# EAGLE board VCSeq PCB1 1.5 TH (EAGLE 6.5.0)
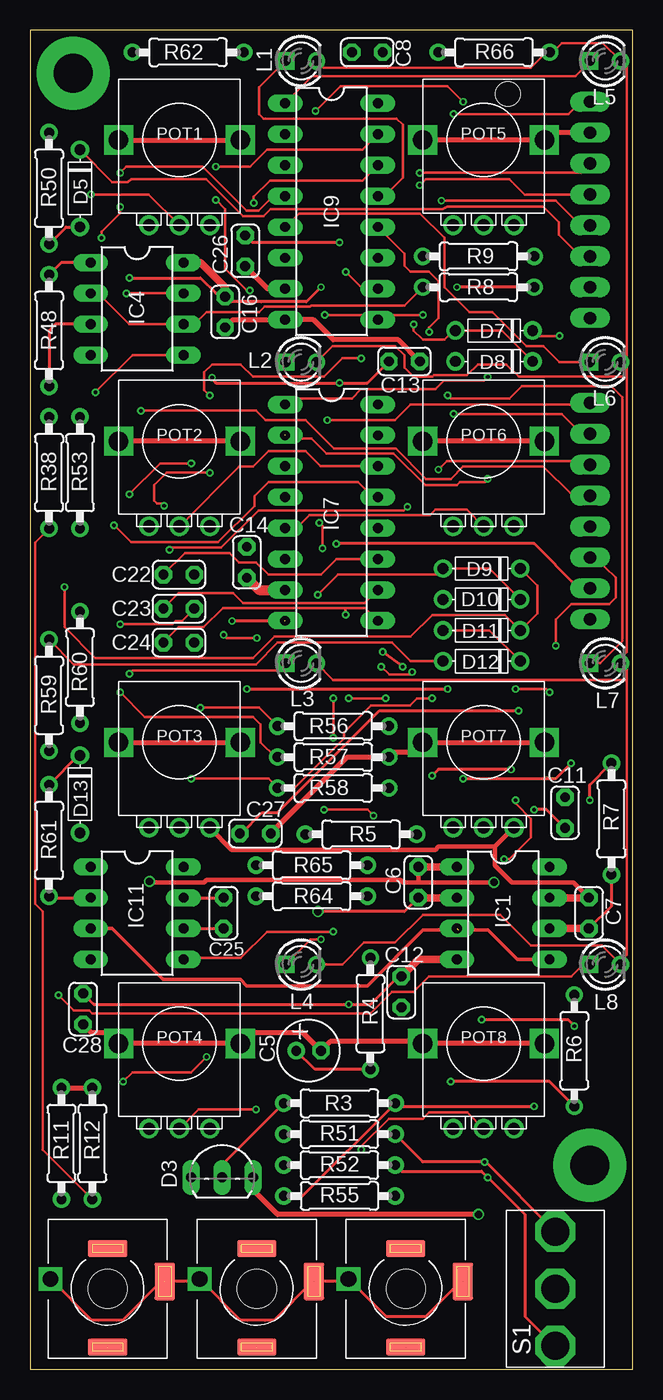
[diagram p0: board, top side]
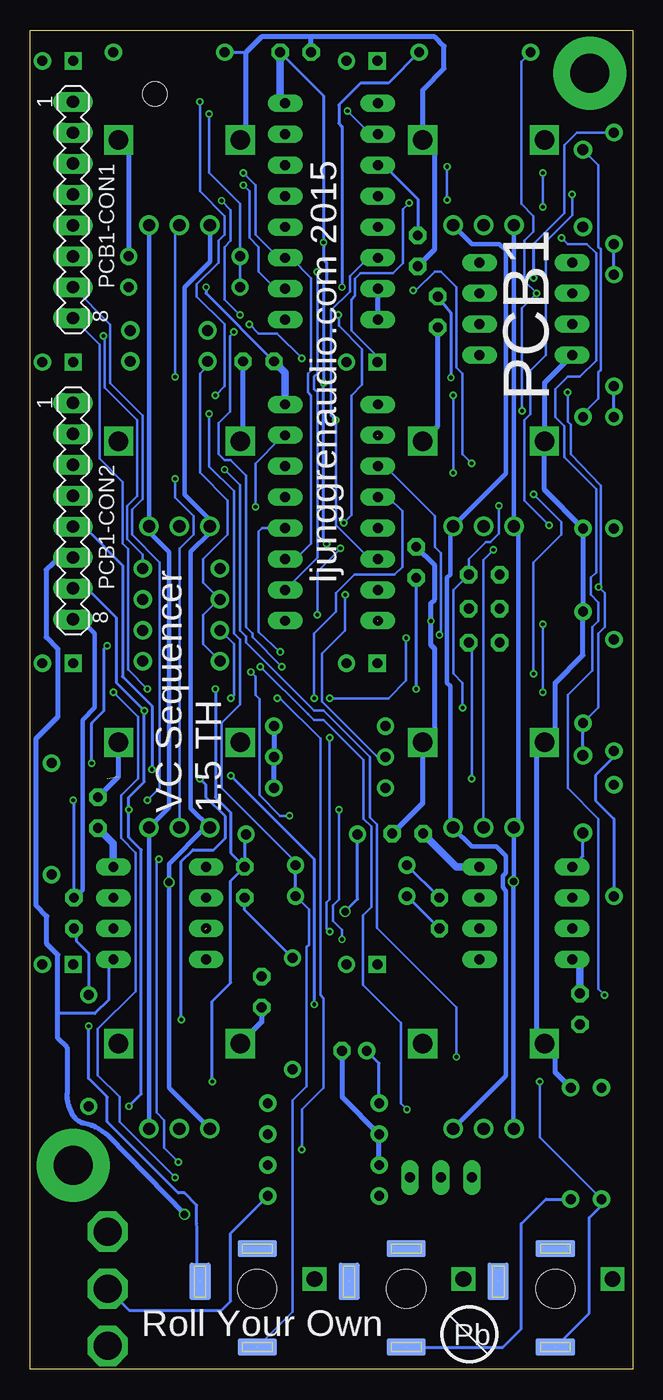
[diagram p1: board, bottom side, seen from below]

Size 49.5 x 110 mm. Coordinates in mm from the lower left corner, seen from the top.
Outline: 0,0 49.5,0 49.5,10 49.5,110 0,110 0,0
Copper layers (1*16): Top 0.035mm / dielectric 1.5mm / Bottom 0.035mm
Design rules "hackvana 12 mil pads 24 mil thermal": minimum track width 6mil, minimum drill 0.3mm, track to track 6mil, track to pad 6mil, pad to pad 6mil, via to via 6mil, smd to smd 0mil, copper to edge 6mil, drill to drill 6mil, minimum pad ring 12mil, minimum via ring 6mil, stop-mask expansion 2mil, vias tented up to drill 100mil, thermal gap 24mil
Holes 3.2 mm at 6.36,6.6 18.61,6.6 30.87,6.6
Holes 2 mm at 39.25,104.78

## Footprints (pad centres in the part's own frame; a part is rotated, then mirrored left to right if it is on the bottom)
E2-5 = drill 0.813 pad 1.27: + -1.016,0 | drill 0.813 pad 1.27 octagon: - 1.016,0
C025-024X044 = drill 0.813 octagon: 1 -1.27,0; 2 1.27,0
ERTHENVAR-SLOTS = smd 3.2 x 1.4 bottom: NORMLB 0,-3.3; TIPB 0,4.8 | smd 3.2 x 1.4: NORMLT 0,-3.3; TIPT 0,4.8 | smd 1.7 x 3.1 bottom: RING1B -4.7,-0.6 | smd 1.7 x 3.1: RING1T -4.7,-0.6 | drill 1.3 pad 1.778 square: RING2H 4.7,-0.8
TO92-LINE = drill 0.813 long: 1 2.54,0; 2 0,0; 3 -2.54,0
DO35-6 = drill 0.9: ANODE 3.175,0; CATHODE -3.175,0
DIL08 = drill 0.813 pad 1.27 long: 1 -3.81,-3.81; 2 -1.27,-3.81; 3 1.27,-3.81; 4 3.81,-3.81; 5 3.81,3.81; 6 1.27,3.81; 7 -1.27,3.81; 8 -3.81,3.81
DIL16 = drill 0.813 long: 1 -8.89,-3.81; 2 -6.35,-3.81; 3 -3.81,-3.81; 4 -1.27,-3.81; 5 1.27,-3.81; 6 3.81,-3.81; 7 6.35,-3.81; 8 8.89,-3.81; 9 8.89,3.81; 10 6.35,3.81; 11 3.81,3.81; 12 1.27,3.81; 13 -1.27,3.81; 14 -3.81,3.81; 15 -6.35,3.81; 16 -8.89,3.81
LED3MM = drill 0.813 square: A -1.27,0 | drill 0.813: K 1.27,0
MA08-1 = drill 1.016 long: 1 -8.89,0; 2 -6.35,0; 3 -3.81,0; 4 -1.27,0; 5 1.27,0; 6 3.81,0; 7 6.35,0; 8 8.89,0
POT-ALPHA9 = drill 1.6 pad 2.184 square: GND$1 -5,0; GND$2 5,0 | drill 1: LEFT -2.5,-7; MID 0,-7; RIGHT 2.5,-7
0207/9 = drill 0.813: 1 -4.58,0; 2 4.58,0
SPDT-HORIZONTAL-TOP-SUBMINI-MULTICOMP = drill 2.3 pad 3.1 octagon: 1 4.7,0; 2 0,0; 3 -4.7,0

## Placement (x,y rotation side)
C5  10uF  [E2-5]  22.87,26.16 0 top
C6  100nF  [C025-024X044]  31.89,40.01 270 top
C7  100nF  [C025-024X044]  45.92,37.47 270 top
C8  100nF  [C025-024X044]  27.69,108.2 0 top
C11  100nF  [C025-024X044]  43.95,45.72 270 top
C12  100nF  [C025-024X044]  30.49,30.99 270 top
C13  100nF  [C025-024X044]  30.74,82.8 180 top
C14  100nF  [C025-024X044]  17.79,66.29 90 top
C16  100nF  [C025-024X044]  16.01,86.87 90 top
C22  1nF  [C025-024X044]  12.2,65.28 180 top
C23  1nF  [C025-024X044]  12.2,62.48 180 top
C24  1nF  [C025-024X044]  12.2,59.69 180 top
C25  15pF  [C025-024X044]  15.88,37.47 270 top
C26  100nF  [C025-024X044]  17.66,91.88 90 top
C27  100nF  [C025-024X044]  18.49,44.01 180 top
C28  100nF  [C025-024X044]  4.33,29.59 270 top
CV/CLK-IN  ERTHENVAR_3.5MM_JACKSLOTS  [ERTHENVAR-SLOTS]  6.35,6.6 180 top
D3  LM4040 5V  [TO92-LINE]  15.76,15.75 0 top
D5  1N4148  [DO35-6]  4.07,97.03 270 top
D7  1N4148  [DO35-6]  38.11,85.34 180 top
D8  1N4148  [DO35-6]  38.11,82.8 180 top
D9  1N4148  [DO35-6]  37.09,65.79 180 top
D10  1N4148  [DO35-6]  37.09,63.25 180 top
D11  1N4148  [DO35-6]  37.09,60.71 180 top
D12  1N4148  [DO35-6]  37.09,58.17 180 top
D13  1N4148  [DO35-6]  4.07,47.24 270 top
IC1  LM358  [DIL08]  38.87,37.47 270 top
IC4  LM393  [DIL08]  8.77,87.12 270 top
IC7  CD4051  [DIL16]  24.75,70.38 270 top
IC9  CD4051  [DIL16]  24.75,95.12 270 top
IC11  TL072  [DIL08]  8.77,37.47 270 top
L1  Amber  [LED3MM]  22.25,107.5 0 top
L2  Amber  [LED3MM]  22.25,82.75 0 top
L3  Amber  [LED3MM]  22.25,58 0 top
L4  Amber  [LED3MM]  22.25,33.25 0 top
L5  Amber  [LED3MM]  47.25,107.5 0 top
L6  Amber  [LED3MM]  47.25,82.75 0 top
L7  Amber  [LED3MM]  47.25,58 0 top
L8  Amber  [LED3MM]  47.25,33.25 0 top
OUT  ERTHENVAR_3.5MM_JACKSLOTS  [ERTHENVAR-SLOTS]  30.85,6.6 180 top
PCB1-CON1  [MA08-1]  46,95.25 270 bottom
PCB1-CON2  [MA08-1]  46,70.5 270 bottom
POT1  100K  [POT-ALPHA9]  12.25,101 0 top
POT2  100K  [POT-ALPHA9]  12.25,76.25 0 top
POT3  100K  [POT-ALPHA9]  12.25,51.5 0 top
POT4  100K  [POT-ALPHA9]  12.25,26.75 0 top
POT5  100K  [POT-ALPHA9]  37.25,101 0 top
POT6  100K  [POT-ALPHA9]  37.25,76.25 0 top
POT7  100K  [POT-ALPHA9]  37.25,51.5 0 top
POT8  100K  [POT-ALPHA9]  37.25,26.75 0 top
R3  4.7K  [0207/9]  25.41,21.84 0 top
R4  27K  [0207/9]  27.95,29.21 270 top
R5  27K  [0207/9]  27.19,43.94 0 top
R6  27K  [0207/9]  44.71,26.16 270 top
R7  27K  [0207/9]  47.76,45.21 90 top
R8  100K  [0207/9]  36.84,88.9 0 top
R9  27K  [0207/9]  36.84,91.44 0 top
R11  100K  [0207/9]  2.55,18.54 270 top
R12  100K  [0207/9]  5.09,18.54 270 top
R38  27K  [0207/9]  1.53,73.66 90 top
R48  1M  [0207/9]  1.53,85.34 90 top
R50  27K  [0207/9]  1.53,97.03 90 top
R51  1M  [0207/9]  25.41,19.3 0 top
R52  1M  [0207/9]  25.41,16.76 0 top
R53  1M  [0207/9]  4.07,73.66 90 top
R55  100K  [0207/9]  25.41,14.22 180 top
R56  100K  [0207/9]  24.9,52.83 0 top
R57  100K  [0207/9]  24.9,50.29 0 top
R58  100K  [0207/9]  24.9,47.75 0 top
R59  100K  [0207/9]  1.53,55.37 270 top
R60  100K  [0207/9]  4.07,57.66 90 top
R61  100K  [0207/9]  1.53,43.43 90 top
R62  27K  [0207/9]  12.96,108.2 0 top
R64  100K  [0207/9]  23.12,38.86 0 top
R65  1K  [0207/9]  23.12,41.4 0 top
R66  2.2K  [0207/9]  38.11,108.2 0 top
R-IN  ERTHENVAR_3.5MM_JACKSLOTS  [ERTHENVAR-SLOTS]  18.6,6.6 180 top
S1  SPDT on-off-on  [SPDT-HORIZONTAL-TOP-SUBMINI-MULTICOMP]  43.15,6.6 270 top

## Library data of the parts
C5-C8 C11-C14 C16 C22-C28 CV/CLK-IN D3 D5 D7-D13 IC1 IC4 IC7 IC9 IC11 L1-L8 OUT POT1-POT8 R3-R9 R11 R12 R38 R48 R50-R53 R55-R62 R64-R66 R-IN S1 = Roll Your Own
PCB1-CON1 PCB1-CON2 = Roll Your Own; OC_FARNELL: unknown; OC_NEWARK: unknown

## Nets
0V: C5.- C8.1 C11.1 C12.2 C13.1 C14.2 C16.1 C26.1 C27.1 C28.2 CV/CLK-IN.RING1B CV/CLK-IN.RING1T CV/CLK-IN.RING2H D3.1 IC1.3 IC1.5 IC4.4 IC7.8 IC9.7 IC9.8 IC11.3 OUT.RING1B OUT.RING1T OUT.RING2H PCB1-CON1.2 PCB1-CON2.6 POT1.GND$1 POT1.GND$2 POT2.GND$1 POT2.GND$2 POT3.GND$1 POT3.GND$2 POT4.GND$1 POT4.GND$2 POT5.GND$1 POT5.GND$2 POT6.GND$1 POT6.GND$2 POT7.GND$1 POT7.GND$2 POT8.GND$1 POT8.GND$2 R9.2 R11.1 R12.1 R51.1 R52.1 R53.1 R56.2 R57.2 R58.2 R60.2 R66.1 R-IN.RING1B R-IN.RING1T R-IN.RING2H
+5V: C7.1 IC1.7 PCB1-CON2.8 POT1.RIGHT POT2.RIGHT POT3.RIGHT POT4.RIGHT POT5.RIGHT POT6.RIGHT POT7.RIGHT POT8.RIGHT R7.2
+12V: C8.2 C11.2 C13.2 C16.2 C26.2 C27.2 IC1.8 IC4.8 IC7.16 IC9.3 IC9.16 IC11.8 PCB1-CON2.7 R3.2 R8.2 R50.2 R55.2 R62.2
-5V: C6.1 C14.1 IC1.1 IC7.7 POT1.LEFT POT2.LEFT POT3.LEFT POT4.LEFT POT5.LEFT POT6.LEFT POT7.LEFT POT8.LEFT R5.2 R6.2
-12V: C12.1 C28.1 IC1.4 IC11.4 PCB1-CON2.5
BUS_A1: C22.2 IC7.11 IC9.11 PCB1-CON1.3
BUS_B1: C23.2 IC7.10 IC9.10 PCB1-CON1.4
BUS_C1: C24.2 IC7.9 IC9.9 PCB1-CON1.5
COMP_REF_1: IC4.2 IC4.6 PCB1-CON1.1 R8.1 R9.1
CV/CLOCK-IN1: CV/CLK-IN.TIPB CV/CLK-IN.TIPT PCB1-CON2.3 R11.2
DISABLE1: IC7.6 IC9.6 PCB1-CON2.1
N$3: C25.2 IC11.6 R64.1
N$4: R12.2 R38.1 R-IN.TIPB R-IN.TIPT
N$6: C7.2 IC1.6 R6.1 R7.1
N$11: D8.ANODE D10.ANODE D12.ANODE R59.1
N$12: IC4.3 R38.2 R48.1
N$14: D5.ANODE IC4.1 R48.2 R50.1
N$15: L1.K L2.K L3.K L4.K L5.K L6.K L7.K L8.K R66.2
N$18: IC7.4 POT8.MID
N$19: IC7.2 POT7.MID
N$20: IC7.5 POT6.MID
N$21: IC7.1 POT5.MID
N$22: IC7.12 POT4.MID
N$23: IC7.15 POT3.MID
N$24: IC7.14 POT2.MID
N$25: IC7.13 POT1.MID
N$30: R55.1 S1.2
N$31: C6.2 IC1.2 R4.1 R5.1
N$39: C5.+ D3.2 R3.1 R4.2
N$42: IC7.3 IC11.5
N$43: C22.1 D7.ANODE D8.CATHODE R56.1
N$48: C23.1 D9.ANODE D10.CATHODE R57.1
N$52: C24.1 D11.ANODE D12.CATHODE R58.1
N$55: D13.ANODE IC11.1
N$60: IC11.2 R59.2 R61.1
N$61: D7.CATHODE D9.CATHODE D11.CATHODE D13.CATHODE IC4.5 R60.1 R61.2
N$93: C25.1 IC11.7 R65.1
OUT1: OUT.TIPB OUT.TIPT PCB1-CON2.2 R64.2 R65.2
PE1: PCB1-CON1.8 R52.2 S1.1
RESET1: D5.CATHODE PCB1-CON1.6 R53.2
STEP1: IC9.13 L1.A
STEP2: IC9.14 L2.A
STEP3: IC9.15 L3.A
STEP4: IC9.12 L4.A
STEP5: IC9.1 L5.A
STEP6: IC9.5 L6.A
STEP7: IC9.2 L7.A
STEP8: IC9.4 L8.A
TRIGS1: IC4.7 PCB1-CON2.4 R62.1
U/D1: PCB1-CON1.7 R51.2 S1.3

## Tracks (layer width: path | path; a pad name or v marks a point on that pad's centre or on a via)
0V  (via drill 0.3, 0.6)  (6 unrouted)
  Top 0.22: v43.19,59.44 43.19,61.59 44.46,62.87 47.57,62.87 48.11,63.41 48.11,65.05 46.41,66.69
  Top 0.254: CV/CLK-IN.RING2H 4.99,4.06 7.63,4.06 10.76,7.2 CV/CLK-IN.RING1T 13.7,7.2 R-IN.RING2H 17.24,4.06 20.07,4.06 23.21,7.2 R-IN.RING1T 25.95,7.2 OUT.RING2H 29.23,4.32 32.52,4.32 35.4,7.2 OUT.RING1T | 20.92,61.47 v16.58,61.47 | v44.71,28.19 44.2,28.7 v37.09,28.7 | v35.57,48.51 43.19,48.51 v44.46,49.78 | 46.41,66.69 PCB1-CON2.6
  Top 0.3: IC1.5 40.01,33.66 37.6,36.07 35.19,36.07 | 34.93,36.07 32.27,36.07 27.69,31.5 17.79,31.5 17.28,32 10.93,32 6.74,36.2 IC11.3
  Top 0.406: v36.84,12.7 20.33,12.7 18.23,14.8 18.23,16.19 D3.1 | IC1.3 34.93,36.07 | PCB1-CON1.2 42.93,101.6 42.33,101 POT5.GND$2 POT5.GND$1 | POT1.GND$1 POT1.GND$2 | C26.1 19.51,88.77 IC9.7 | C16.1 16.64,86.23 IC9.8 23.25,86.23 24.9,84.58 30.23,84.58 C13.1 | POT6.GND$2 POT6.GND$1 | POT2.GND$2 POT2.GND$1 | POT3.GND$1 POT3.GND$2 | C28.2 4.96,27.69 6.36,27.69 7.25,26.79 POT4.GND$1 POT4.GND$2 18.19,27.69 22.36,27.69 C5.- 24.65,26.92 32.08,26.92 POT8.GND$1 POT8.GND$2 | R11.1 R12.1 | POT7.GND$2 POT7.GND$1 31.42,50.67 29.85,50.67 R57.2 26.04,50.29 C27.1
  Bottom 0.254: 18.23,16.19 D3.1 | 35.8,7.45 35.8,11.67 35.82,11.94 35.82,13.46 36.84,14.48 37.35,14.48 43.19,20.32 43.19,22.35 44.71,23.88 v44.71,28.19 | 43.06,33.66 43.06,30.35 44.2,29.21 47.25,29.21 | v37.09,28.7 37.09,41.72 36.14,42.67 34.42,42.67 33.47,43.62 33.47,45.4 35.06,46.99 35.06,48.01 v35.57,48.51 | v44.46,49.78 44.46,53.09 43.44,54.1 43.44,59.18 v43.19,59.44 | R66.1 31.76,108.2
  Bottom 0.406: v36.84,12.7 43.12,19.18 arc-31 45.09,20.19 arc45 45.98,20.83 arc27 46.49,22.61 46.49,26.42 47.25,27.18 47.25,29.21 47.25,34.04 48.14,34.92 48.14,37.21 49.03,38.1 49.03,51.82 47.25,53.59 47.25,59.18 48.2,60.13 48.2,65.66 47.11,66.69 PCB1-CON2.6 | 35.8,7.45 OUT.RING1T | 43.06,33.66 IC1.5 | POT5.GND$1 31.76,101.49 31.76,108.2 30.49,109.47 26.42,109.47 | 26.42,109.47 16.26,109.47 15.5,108.71 15.5,106.87 17.25,105.13 POT1.GND$2 16.26,100.01 16.26,92.01 C26.1 | C8.1 26.42,109.47 | IC9.8 IC9.7 | POT5.GND$2 41.42,100.17 R9.2 | IC4.4 7.25,81.02 POT2.GND$1 7.25,72.26 R53.1 R60.2 4.07,58.67 6.36,56.39 6.36,52.39 POT3.GND$1 7.25,51.18 7.88,50.55 7.88,27.38 POT4.GND$1 7.2,26.75 6.36,25.91 6.36,24.39 R12.1 | POT2.GND$2 16.01,77.49 C16.1 | C14.2 16.26,66.04 16.26,63.25 16.58,62.93 v16.58,61.47 16.58,59.5 16.26,59.18 16.26,52.49 POT3.GND$2 17.25,46.51 C27.1 | R52.1 R51.1 23.88,22.35 C5.- | C12.2 30.49,28.51 POT8.GND$1 | R58.2 R57.2 R56.2 | C11.1 42.25,48.69 POT7.GND$2 | C13.1 32.01,76.49 POT6.GND$1
+5V  (via drill 0.3)
  Top 0.254: v45.98,46.74 45.98,48.01 R7.2
  Top 0.35: POT3.RIGHT 14.75,44.46 16.54,42.67 33.28,42.67 33.54,42.93 38.18,42.93 | POT7.RIGHT 38.18,42.93 | 38.18,42.93 38.18,41.4 39.57,40.01 44.65,40.01 C7.1
  Top 0.6: IC1.7 C7.1
  Bottom 0.254: C7.1 45.92,46.67 v45.98,46.74
  Bottom 0.35: PCB1-CON2.8 45.86,61.47 45.22,61.47 44.2,60.45 44.2,54.36 45.22,53.34 45.22,39.37 45.85,38.73 C7.1 | POT4.RIGHT 10.42,24.08 10.42,39.31 10.68,39.56 10.68,40.51 10.42,40.77 10.42,42.16 11.18,42.93 13.22,42.93 14.75,44.46 POT3.RIGHT 14.99,44.74 14.99,56.13 15.25,56.39 15.25,65.02 14.99,65.28 14.99,68.83 14.75,69.08 POT2.RIGHT 10.42,73.58 10.42,91.95 10.93,92.46 13.22,92.46 POT1.RIGHT | POT8.RIGHT POT7.RIGHT 38.11,46.14 38.11,67.12 39.76,68.77 POT6.RIGHT POT5.RIGHT
+12V  (via drill 0.3)
  Top 0.23: 18.99,87.69 22.68,87.69 22.8,87.82
  Top 0.254: R8.2 v35.06,88.9 | v14.93,81.47 15.25,81.03 v25.41,81.03 27.69,81.03 C13.2 | 18.99,87.69 16.45,87.69 16.01,88.01 C16.2 15.76,88.39 15.25,88.39 13.98,89.66 v8.14,89.66 | 22.8,87.82 v23.88,88.9 | C26.2 18.23,92.58 v25.41,92.58 | PCB1-CON2.7 45.89,64.26 44.97,64.26 41.41,67.82 v25.15,67.82 | C27.2 17.34,44.01 19.06,45.72 20.33,45.72 28.71,54.1 v40.14,54.1 | R55.2 22.37,14.22 R3.2 30.24,21.59 v41.41,21.59 | C11.2 42.43,45.97 v41.41,45.97
  Top 0.6: C16.2 16.01,88.9 13.98,90.93 IC4.8
  Bottom 0.22: 8.14,92.46 5.6,95 5.6,100.58 4.57,101.61 R50.2
  Bottom 0.254: v35.06,88.9 35.06,88.39 C13.2 | C16.2 14.93,86.81 v14.93,81.47 | R62.2 20.08,105.66 22.36,105.66 24.14,103.89 24.14,102.36 23.88,102.11 v23.88,88.9 | 8.14,92.46 v8.14,89.66 | IC9.3 20.82,98.81 20.33,98.81 17.66,96.14 C26.2 | C8.2 25.41,104.65 v25.41,92.58 25.41,91.19 25.15,90.93 25.15,89.41 25.41,89.15 v25.41,81.03 25.41,68.07 v25.15,67.82 | PCB1-CON2.7 45.6,63.75 44.46,63.75 42.43,61.72 42.43,56.39 v40.14,54.1 40.14,48.26 41.41,46.99 v41.41,45.97 41.41,43.69 40.39,42.67 40.39,22.61 v41.41,21.59
  Bottom 0.6: IC7.16 28.56,81.89 C13.2 | C27.2 14.49,41.27 IC11.8 | IC1.8 42.68,43.18 C11.2 | IC9.16 28.96,104.41 C8.2
-5V  (via drill 0.3, 0.6)
  Top 0.254: v17.79,55.88 v34.3,55.88 | R6.2 42.67,23.62 v34.55,23.62
  Top 0.35: 9.85,40.01 14.3,40.01 14.49,40.2 30.42,40.2 30.61,40.01 32.01,40.01 | 32.01,40.01 v38.11,40.01 | C6.1 31.89,40.13 32.01,40.01
  Top 0.406: v9.79,40.07 9.85,40.01
  Top 0.6: IC1.1 C6.1
  Top 0.813: C14.1 18.78,64.03 IC7.7
  Bottom 0.254: C14.1 v17.79,55.88 | v34.3,55.88 34.3,46.99 33.03,45.72 33.03,42.42 C6.1 | R5.2 31.89,43.82 C6.1 | v34.55,23.62 34.55,30.23 33.03,31.75 33.03,40.13 C6.1
  Bottom 0.35: POT5.LEFT 34.75,90.99 36.84,88.9 36.84,71.85 34.75,69.76 POT6.LEFT 34.75,68.74 36.33,67.16 36.33,46.08 POT7.LEFT 35.01,44.5 35.19,44.45 38.11,41.52 v38.11,40.01 38.11,23.11 POT8.LEFT | 9.75,40.1 POT3.LEFT 9.41,44.84 9.41,68.83 9.75,69.18 POT2.LEFT POT1.LEFT | 9.79,19.79 v9.79,40.07
  Bottom 0.406: 9.75,40.1 v9.79,40.07 | POT4.LEFT 9.79,19.79
-12V  (via drill 0.3)
  Top 0.254: C28.1 5.21,29.97 v26.17,29.97 27.95,29.97 30.23,32.26 C12.1 | v39.51,49.28 33.54,49.28 v33.03,48.77
  Top 0.6: C12.1 31.89,33.66 IC1.4
  Bottom 0.254: PCB1-CON2.5 45.86,69.09 44.97,69.09 41.92,66.04 41.92,56.9 39.51,54.48 v39.51,49.28 | v33.03,48.77 26.17,41.91 v26.17,29.97
  Bottom 0.6: C28.1 4.33,33.27 4.71,33.66 IC11.4
BUS_A1  (via drill 0.3)
  Top 0.22: PCB1-CON1.3 45.24,98.3 v32.01,98.3 | C22.2 12.71,67.06 16.39,67.06 17.15,66.29 18.55,66.29 19.57,65.28 23.88,65.28 25.18,66.57 IC7.11
  Bottom 0.22: v32.01,98.3 31,97.28 31,93.22 29.09,91.31 IC9.11 28.07,91.31 26.42,89.66 26.42,82.04 26.68,81.79 26.68,80.26 26.42,80.01 26.42,67.82 27.69,66.55 27.95,66.55 27.97,66.57 IC7.11
BUS_B1  (via drill 0.3)
  Top 0.22: PCB1-CON1.4 40.65,96.52 39.38,97.79 32.52,97.79 v32.01,97.28 | C23.2 12.2,63.75 16.64,63.75 17.47,62.93 27.46,62.93 IC7.10 | v25.92,90.17 27.32,88.77 IC9.10
  Bottom 0.22: v32.01,97.28 31.5,96.77 31.5,92.96 30.74,92.2 30.74,90.17 29.47,88.9 28.69,88.9 IC9.10 | IC7.10 25.92,66.67 25.92,80.26 26.17,80.52 26.17,81.53 25.92,81.79 v25.92,90.17
BUS_C1  (via drill 0.3)
  Top 0.22: PCB1-CON1.5 45.22,93.98 43.19,96.01 v33.79,96.01 | v32.27,86.61 28.94,86.61 IC9.9 28.18,86.61 v24.2,86.61 | C24.2 12.2,60.96 14.23,60.96 15.82,62.55 25.92,62.55 | 25.92,62.55 27.5,62.55 IC7.9 | v23.76,69.53 24.01,69.28 v24.01,67.44 | v25.92,61.98 25.92,62.55
  Bottom 0.22: v33.79,96.01 33.03,95.25 33.03,92.71 33.54,92.2 33.54,87.88 v32.27,86.61 | v24.2,86.61 24.14,86.55 24.14,85.72 22.23,83.82 22.23,80.9 23.12,80.01 23.12,70.17 v23.76,69.53 | v24.01,67.44 25.92,65.53 v25.92,61.98
COMP_REF_1  (via drill 0.3)
  Top 0.22: PCB1-CON1.1 45.22,104.14 44.2,103.12 v34.81,103.12 | R8.1 30.73,87.38 23.06,87.38 23,87.31 19.25,87.31 18.8,86.87 14.49,86.87 13.47,85.85 IC4.6 8.14,85.85 5.85,88.14 5.21,88.14 IC4.2
  Bottom 0.22: v34.81,103.12 34.81,98.3 32.27,95.76 R9.1 R8.1
CV/CLOCK-IN1  (via drill 0.3)  (1 unrouted)
  Top 0.22: PCB1-CON2.3 45.7,74.61 34.23,74.61 v33.54,73.91 | v14.49,25.65 13.22,24.38 8.39,24.38 v7.63,23.62
  Bottom 0.22: v33.54,73.91 32.27,72.64 32.27,60.71 31.76,60.2 31.76,59.69 26.17,54.1 25.41,54.1 21.6,50.29 21.6,45.34 21.03,44.77 21.03,36.26 14.49,29.72 v14.49,25.65 | v7.63,23.62 7.63,19.04 R11.2
  Bottom 0.254: CV/CLK-IN.TIPT 3.56,4.59 3.56,12.45 2.55,13.46 R11.2
DISABLE1  (via drill 0.3)
  Top 0.22: PCB1-CON2.1 45.86,79.25 31.25,79.25 29.98,77.98 v24.39,77.98
  Bottom 0.22: IC7.6 21.17,66.8 21.85,66.8 24.39,69.34 v24.39,77.98 24.77,78.36 24.77,87 23.25,88.52 23.25,89.79 21.85,91.19 21.06,91.19 IC9.6
N$3
  Top 0.254: IC11.6 C25.2
  Bottom 0.254: C25.2 R64.1
N$4  (1 unrouted)
  Top 0.22: R12.2 1.02,18.03 1.02,37.59 0.39,38.23 0.39,67.94 R38.1
  Bottom 0.254: R-IN.TIPT 18.58,1.78 10.68,1.78 9.15,3.3 9.15,11.94 7.13,13.96 R12.2
N$6
  Top 0.254: R7.1 47.76,38.04 C7.2
  Top 0.6: IC1.6 C7.2
  Bottom 0.254: C7.2 45.73,36.01 45.73,35.18 44.71,34.16 R6.1
N$11
  Top 0.22: R59.1 3.57,57.91 18.55,57.91 20.33,59.69 29.73,59.69 31.25,58.17 D12.ANODE
  Bottom 0.22: D12.ANODE 35.31,59.56 35.31,61.98 34.04,63.25 D10.ANODE 35.31,64.64 35.31,66.55 33.28,68.58 33.28,71.37 35.57,73.66 35.57,81.79 34.93,82.42 D8.ANODE
N$12
  Top 0.254: IC4.3 2.04,85.85 1.53,85.34 R48.1
  Bottom 0.254: R38.2 R48.1
N$14
  Top 0.254: R50.1 2.94,93.85 D5.ANODE | IC4.1 2.54,90.93 R48.2
  Bottom 0.254: R48.2 R50.1
N$15
  Top 0.22: L4.K 25.64,33.25 27.44,35.05 29.98,35.05 32.27,37.34 38.62,37.34 41.16,34.8 46.97,34.8 L8.K 48.52,33.53 49.03,34.04 49.03,56.64 | 49.03,56.64 49.03,57.49 L7.K 48.52,58.42 49.03,58.93 49.03,81.53 | L1.K 24.09,106.93 41.16,106.93 42.43,108.2 R66.2 42.93,108.2 43.7,108.97 47.05,108.97 L5.K 49.03,106.99 49.03,83.31 48.52,82.8 L6.K 49.03,82.24 49.03,82.04 49.03,81.53 | L2.K 24.84,84.07 29.98,84.07 30.74,83.31 30.74,82.3 31.5,81.53 33.03,81.53 33.16,81.66 35.89,81.66 36.77,82.55 39.12,82.55 40.14,81.53 49.03,81.53 | L3.K 24.88,56.64 49.03,56.64
N$18  (via drill 0.3)
  Top 0.22: POT8.MID 35.92,21.08 32.77,21.08 32.27,20.57 29.47,20.57 27.19,18.29 v27.19,18.03 | v29.22,55.12 v26.17,55.12
  Bottom 0.22: v27.19,18.03 27.19,21.34 25.41,23.11 25.41,30.48 25.66,30.73 25.66,51.82 28.96,55.12 v29.22,55.12 | v26.17,55.12 26.17,60.45 24.39,62.23 24.39,63.75 22.87,65.28 19.57,65.28 18.93,65.91 18.93,70.48 20.07,71.63 20.92,71.63 IC7.4
N$19  (via drill 0.3)  (1 unrouted)
  Top 0.22: v37.6,73.15 37.35,72.9 35.31,72.9 35.06,72.64 32.46,72.64 29.85,75.25 24.33,75.25 23.12,76.45 21.22,76.45 20.96,76.71
  Bottom 0.22: POT7.MID 37.25,67.41 36.08,68.58 36.08,70.1 37.6,71.63 v37.6,73.15
N$20
  Top 0.22: POT6.MID 35.89,70.61 33.28,70.61 32.84,70.17 22.93,70.17 21.87,69.11 IC7.5
N$21  (via drill 0.3)
  Top 0.22: IC7.1 21.43,79.76 26.42,79.76 27.19,80.52 33.28,80.52 33.98,81.22 37.28,81.22 v37.6,81.53
  Bottom 0.22: v37.6,81.53 37.6,93.65 POT5.MID
N$22  (via drill 0.3)
  Top 0.22: POT4.MID 13.84,21.34 v18.55,21.34 | v30.61,57.72 v28.96,58.93
  Bottom 0.22: v18.55,21.34 19.06,21.84 19.06,28.45 22.17,31.56 22.17,37.27 21.47,37.97 21.47,44.58 22.11,45.21 22.11,50.04 25.41,53.34 26.17,53.34 26.68,53.85 v30.61,57.72 | v28.96,58.93 30.74,60.58 30.74,68.83 30.47,69.11 IC7.12
N$23  (via drill 0.3)
  Top 0.22: v11.44,67.31 11.63,67.5 15.69,67.5 18.74,70.55 30.68,70.55 v31,70.87
  Bottom 0.22: POT3.MID 12.25,66.5 v11.44,67.31 | v31,70.87 31,74.42 28.96,76.45 28.84,76.45 IC7.15
N$24
  Top 0.22: POT2.MID 17.17,74.17 18.3,74.17 19.57,75.44 22.61,75.44 23.86,74.19 IC7.14
N$25  (via drill 0.3)
  Top 0.22: POT1.MID 9.73,96.52 v4.96,96.52 | v6.87,69.34 8.26,67.94 15.44,67.94 18.42,70.93 18.42,71.75 19.57,72.9 26.93,72.9 28.18,71.65 IC7.13
  Bottom 0.22: v4.96,96.52 4.96,94.81 7.12,92.65 7.12,83.31 8.39,82.04 8.39,78.49 8.9,77.98 8.9,71.37 v6.87,69.34
N$30
  Bottom 0.254: S1.2 41.38,4.83 33.79,4.83 33.03,5.59 33.03,11.18 R55.1
N$31  (via drill 0.6)
  Top 0.254: C6.2 30.74,37.59 v23.63,37.59
  Top 0.6: C6.2 IC1.2
  Bottom 0.254: R4.1 31.89,37.73 C6.2 | v23.63,37.59 22.61,38.62 R5.1
N$39
  Top 0.254: R4.2 23.38,24.63 C5.+ | D3.2 15.76,16.77 R3.1
  Bottom 0.254: R3.1 20.83,25.14 C5.+
N$42  (via drill 0.3)
  Top 0.22: v15.88,60.33 16.14,60.07 v18.61,60.07 | v24.9,55.12 v24.9,51.88 | v24.9,35.94 19.44,35.94 17.28,33.78 12.71,33.78 IC11.5
  Bottom 0.22: IC7.3 20.92,74.17 20.33,74.17 16.26,70.1 16.26,67.56 15.76,67.06 15.76,60.45 v15.88,60.33 | v18.61,60.07 18.61,56.58 20.07,55.12 v24.9,55.12 | v24.9,51.88 24.9,38.61 25.15,38.35 25.15,36.2 v24.9,35.94
N$43  (via drill 0.3)
  Top 0.22: D8.CATHODE 38.74,85.34 D7.ANODE 34.81,85.34 34.04,84.58 32.27,84.58 31.5,85.34 v31.5,85.85 | v10.99,70.93 10.8,71.12 10.42,71.12 10.17,71.37 10.17,72.64 11.18,73.66 v14.74,73.66 | v14.74,80.01 14.3,80.45 14.3,81.92 14.93,82.55 17.28,82.55 18.3,81.53 24.14,81.53 25.66,83.06 v27.19,83.06 | v13.98,54.36 18.8,54.36 R56.1
  Bottom 0.22: v10.99,70.93 10.99,68.64 11.69,67.94 12.07,67.94 13.47,66.55 C22.1 14.74,64.01 14.74,57.15 13.98,56.39 v13.98,54.36 | v14.74,73.66 v14.74,80.01 | v27.19,83.06 29.22,85.09 30.74,85.09 v31.5,85.85
N$48  (via drill 0.3)
  Top 0.22: D10.CATHODE 37.73,65.79 D9.ANODE 33.41,65.28 25.28,65.28 v23.63,63.63 | C23.1 12.45,61.47 11.95,61.47 11.69,61.21 v7.37,61.21 | v7.37,55.63 9.41,53.59 18.3,53.59 18.93,52.96 18.93,51.5 20.14,50.29 R57.1
  Bottom 0.22: v7.37,61.21 v7.37,55.63 | v23.63,63.63 23.63,60.71 25.54,58.8 25.54,54.86 20.96,50.29 R57.1
N$52  (via drill 0.3)
  Top 0.22: D12.CATHODE 37.73,60.71 D11.ANODE | v13.22,48.51 19.56,48.51 R58.1 21.73,47.75 25.79,51.82 25.79,52.32 28.01,54.55 31.19,54.55 31.76,55.12 v33.03,55.12
  Bottom 0.22: v13.22,48.51 13.22,59.44 C24.1 | D11.ANODE 32.77,59.56 32.77,55.37 v33.03,55.12
N$55
  Bottom 0.254: IC11.1 4.07,42.16 D13.ANODE
N$60
  Top 0.254: R61.1 1.65,38.73 IC11.2
  Bottom 0.254: R59.2 1.53,50.29 3.06,48.77 3.06,46.74 1.53,45.21 R61.1
N$61  (via drill 0.3)
  Top 0.22: v5.34,80.26 8.39,83.31 IC4.5 | D7.CATHODE 41.73,84.9 v43.51,84.9 | D9.CATHODE 41.66,64.39 41.66,62.1 D11.CATHODE 39,61.98 33.03,61.98 31.25,60.2 20.07,60.2 18.3,58.42 5.34,58.42 2.8,60.96 v2.8,64.26
  Top 0.254: R61.2 3.94,50.42 D13.CATHODE
  Bottom 0.22: R60.1 2.8,54.35 2.8,60.45 2.29,60.96 2.29,63.75 v2.8,64.26 2.61,64.52 2.61,72.58 5.09,75.18 5.09,77.6 5.34,77.85 v5.34,80.26 | v43.51,84.9 43.38,84.77 43.38,80.64 40.71,77.98 40.71,71.75 41.54,70.93 41.54,68.2 40.27,66.93 D9.CATHODE
  Bottom 0.254: D13.CATHODE R60.1
N$67  (via drill 3.2 pad 6)
  other vias: 46,16.75
N$68  (via drill 3.2 pad 6)
  other vias: 3.5,106.5
N$93
  Top 0.254: IC11.7 C25.1
  Bottom 0.254: C25.1 R65.1
OUT1  (via drill 0.3)  (1 unrouted)
  Top 0.22: PCB1-CON2.2 45.89,76.96 45.22,76.96 43.7,78.49 v34.81,78.49
  Bottom 0.22: v34.81,78.49 34.81,74.17 32.77,72.14 32.77,60.45 32.27,59.94 32.27,54.61 33.79,53.09 33.79,47.75 27.7,41.66 R65.2 | OUT.TIPT 27.95,4.7 27.95,22.1 26.8,23.24 26.8,34.67 26.61,34.86 26.61,37.78 R64.2
  Bottom 0.254: R64.2 R65.2
PE1  (via drill 0.3)
  Top 0.22: v39.89,55.88 42.43,55.88 v42.68,55.63
  Top 0.254: R52.2 30.5,16.26 37.09,16.26 v37.6,15.75 40.65,12.7 40.65,4.32 43.07,1.9 S1.1
  Bottom 0.22: PCB1-CON1.8 43.82,84.18 43.82,74.8 41.92,72.9 41.92,67.82 41.47,67.37 41.47,57.47 v39.89,55.88 | v42.68,55.63 40.65,53.59 40.65,48.51 42.05,47.12 42.05,43.62 40.84,42.42 40.84,31.05 43.95,27.94 43.95,24.13 42.17,22.35 42.17,20.32 v37.6,15.75
RESET1
  Top 0.22: PCB1-CON1.6 45.22,91.44 43.44,93.22 43.44,94.23 42.17,95.5 34.3,95.5 33.85,95.31 19.76,95.31 19.18,94.74 17.47,94.74 14.42,97.79 8.26,97.79 8.01,97.54 6.74,97.54 D5.CATHODE
  Bottom 0.22: D5.CATHODE 2.8,98.93 2.8,92.2 2.61,92.01 2.61,82.11 2.8,81.92 2.8,79.76 4.07,78.49 R53.2
STEP1
  Top 0.22: L1.A 18.8,105.32 18.8,103.12 19.18,102.74 30.11,102.74 30.61,102.23 30.61,97.92 29.22,96.52 28.69,96.52 IC9.13
STEP2  (via drill 0.3)
  Top 0.22: v18.36,95.82 18.36,96.33 19.69,97.66 27.29,97.66 IC9.14
  Bottom 0.22: L2.A 20.98,83.2 23.12,85.34 23.12,87.88 22.8,88.2 22.8,89.6 22.36,90.04 19.69,90.04 18.87,90.87 18.87,95.31 v18.36,95.82
STEP3  (via drill 0.3)
  Top 0.22: L3.A 20.98,57.8 20.58,57.4 8.39,57.4 v8.14,57.15 | v8.14,71.88 10.68,74.42 v13.22,74.42 | v18.04,88.65 17.79,88.65 16.01,90.42 16.01,95.31 v15.25,96.08 | v15.25,98.81 18.04,98.81 19.44,100.2 27.29,100.2 IC9.15
  Bottom 0.22: v8.14,57.15 8.14,66.29 5.85,68.58 5.85,69.6 v8.14,71.88 | v13.22,74.42 13.98,75.18 13.98,81.79 14.49,82.3 14.49,88.9 15.76,90.17 16.26,90.17 17.79,88.65 v18.04,88.65 | v15.25,96.08 v15.25,98.81
STEP4  (via drill 0.3)
  Top 0.22: IC9.12 30.74,91.67 30.74,90.68 31.25,90.17 32.77,90.17 33.54,89.41 33.54,86.36 32.77,85.6 v32.77,85.22 | v28.84,57.72 29.54,57.09 31.19,57.09 v31.38,57.28 | v28.2,45.47 27.69,45.97 v24.14,45.97 | v23.88,35.31 23.04,35.31 L4.A
  Bottom 0.22: v32.77,85.22 33.09,84.9 33.09,78.68 34.04,77.72 34.04,75.18 33.54,74.68 33.03,74.68 31.76,73.41 31.76,60.96 31.25,60.45 31.25,60.13 v28.84,57.72 | v31.38,57.28 31,56.9 31,55.37 30.68,55.05 30.68,47.18 28.96,45.47 v28.2,45.47 | v24.14,45.97 24.14,38.61 24.65,38.1 24.65,36.83 23.88,36.07 v23.88,35.31
STEP5
  Top 0.22: IC9.1 23.17,106.24 44.78,106.24 45.98,107.44 L5.A
STEP6
  Top 0.22: L6.A 43.5,82.75 42.17,84.07 40.77,84.07 37.98,86.87 36.08,86.87 34.04,88.9 34.04,92.96 32.01,94.93 22.09,94.93 IC9.5
STEP7  (via drill 0.3)
  Top 0.22: L7.A 46.83,58 48.65,59.82 48.65,79.88 47.76,80.77 40.39,80.77 39.38,79.76 34.55,79.76 v34.3,80.01 | v35.57,104.14 34.3,105.41 25.47,105.41 v23.44,103.38
  Bottom 0.22: v34.3,80.01 33.54,80.77 33.54,85.85 35.82,88.14 35.82,89.15 34.04,90.93 34.04,92.71 33.54,93.22 33.54,94.74 35.57,96.77 v35.57,104.14 | IC9.2 21.53,101.47 v23.44,103.38
STEP8  (via drill 0.3)
  Top 0.22: L8.A 45.45,33.25 44.46,32.26 32.77,32.26 31.5,30.99 29.73,30.99 27.95,29.21 5.09,29.21 4.83,29.46 3.56,29.46 v2.29,30.73 | v5.85,92.96 5.85,93.47 7.37,95 v7.37,95.5 | IC9.4 19.94,96.39 18.74,95.19 17.79,95.19 14.17,98.81 7.88,98.81 v7.37,98.3
  Bottom 0.22: v2.29,30.73 2.8,31.24 2.8,45.21 5.34,47.75 5.34,55.37 3.31,57.4 3.31,60.96 2.8,61.47 2.8,62.99 3.44,63.63 3.44,65.02 2.99,65.47 2.99,72.33 5.6,74.93 5.6,77.47 6.36,78.23 6.36,80.52 5.34,81.53 4.33,81.53 2.99,82.87 2.99,91.69 3.75,92.46 5.34,92.46 v5.85,92.96 | v7.37,95.5 v7.37,98.3
TRIGS1  (via drill 0.3)
  Top 0.22: IC4.7 v7.88,88.39 | PCB1-CON2.4 45.89,71.88 44.46,71.88 42.17,74.17 35.57,74.17 34.55,73.15 32.52,73.15 30.04,75.63 24.96,75.63 22.61,77.98 19.31,77.98 18.55,78.74 v9.09,78.74
  Bottom 0.22: R62.1 8.38,108.21 9.15,107.44 9.15,95.76 8.14,94.74 8.14,93.47 8.9,92.71 8.9,89.41 v7.88,88.39 9.09,87.19 v9.09,78.74
U/D1  (via drill 0.3)
  Top 0.22: v39.89,46.74 39.89,46.48 41.16,45.21 41.16,43.69 39.38,41.91 v38.93,41.91
  Top 0.254: S1.3 37.43,17.02 v37.35,17.02 32.27,17.02 R51.2
  Bottom 0.22: PCB1-CON1.7 42.93,85.83 42.93,81.03 40.27,78.36 40.27,71.5 41.16,70.61 41.16,68.58 38.87,66.29 38.87,47.75 v39.89,46.74 | v38.93,41.91 39.12,41.72 39.12,21.08 38.49,20.45 38.49,18.16 v37.35,17.02

## Text on the board
bPlace: PCB1 | ljunggrenaudio.com 2015 | VC Sequencer / 1.5 TH | Roll Your Own | Pb